# Altium PCB 795532117DJFLY-DG.PcbDoc
Units mm, origin at the board's own origin, x right, y up, seen from the top; angles counter-clockwise.
Board outline 30 x 36.5 mm, 2 copper layers (Top Layer, Bottom Layer); 40 components, 46 nets, 168 pads, 243 vias.
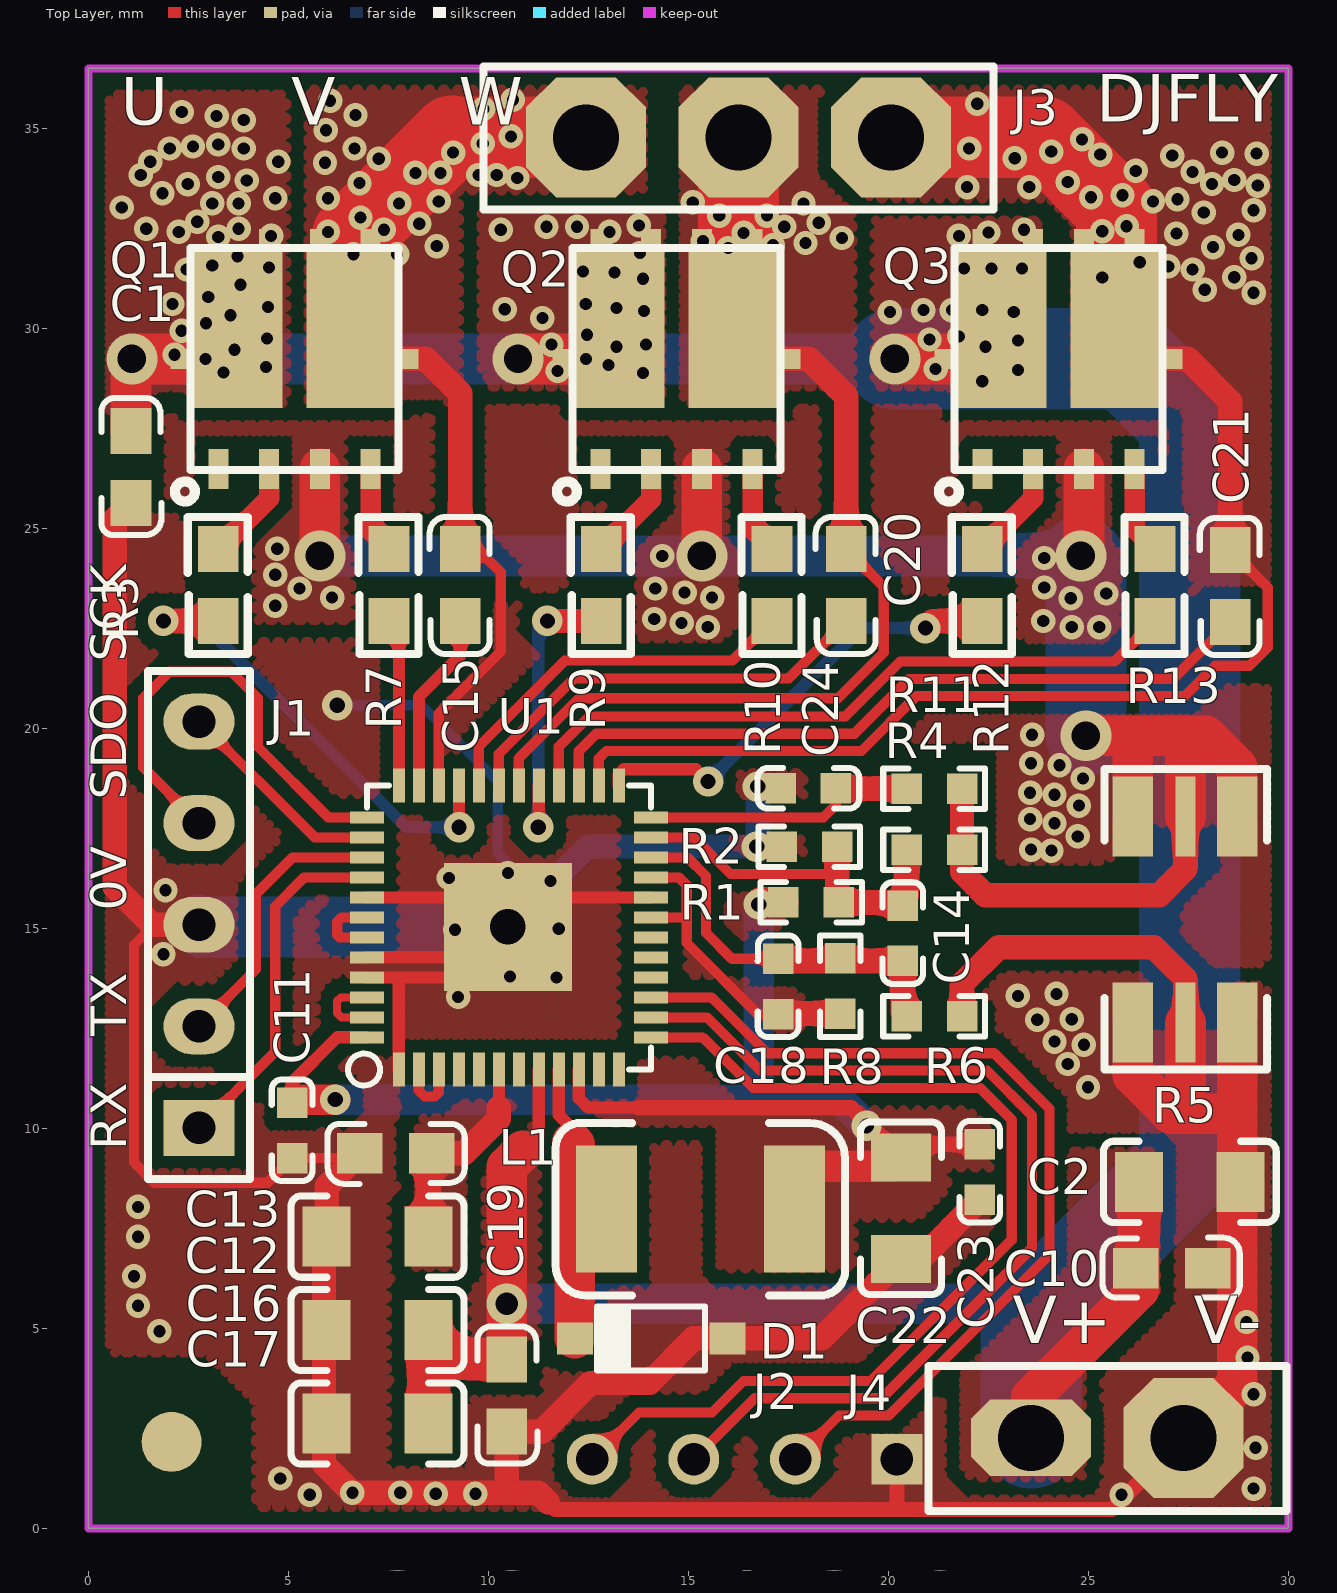
[diagram p0: Top Layer view]
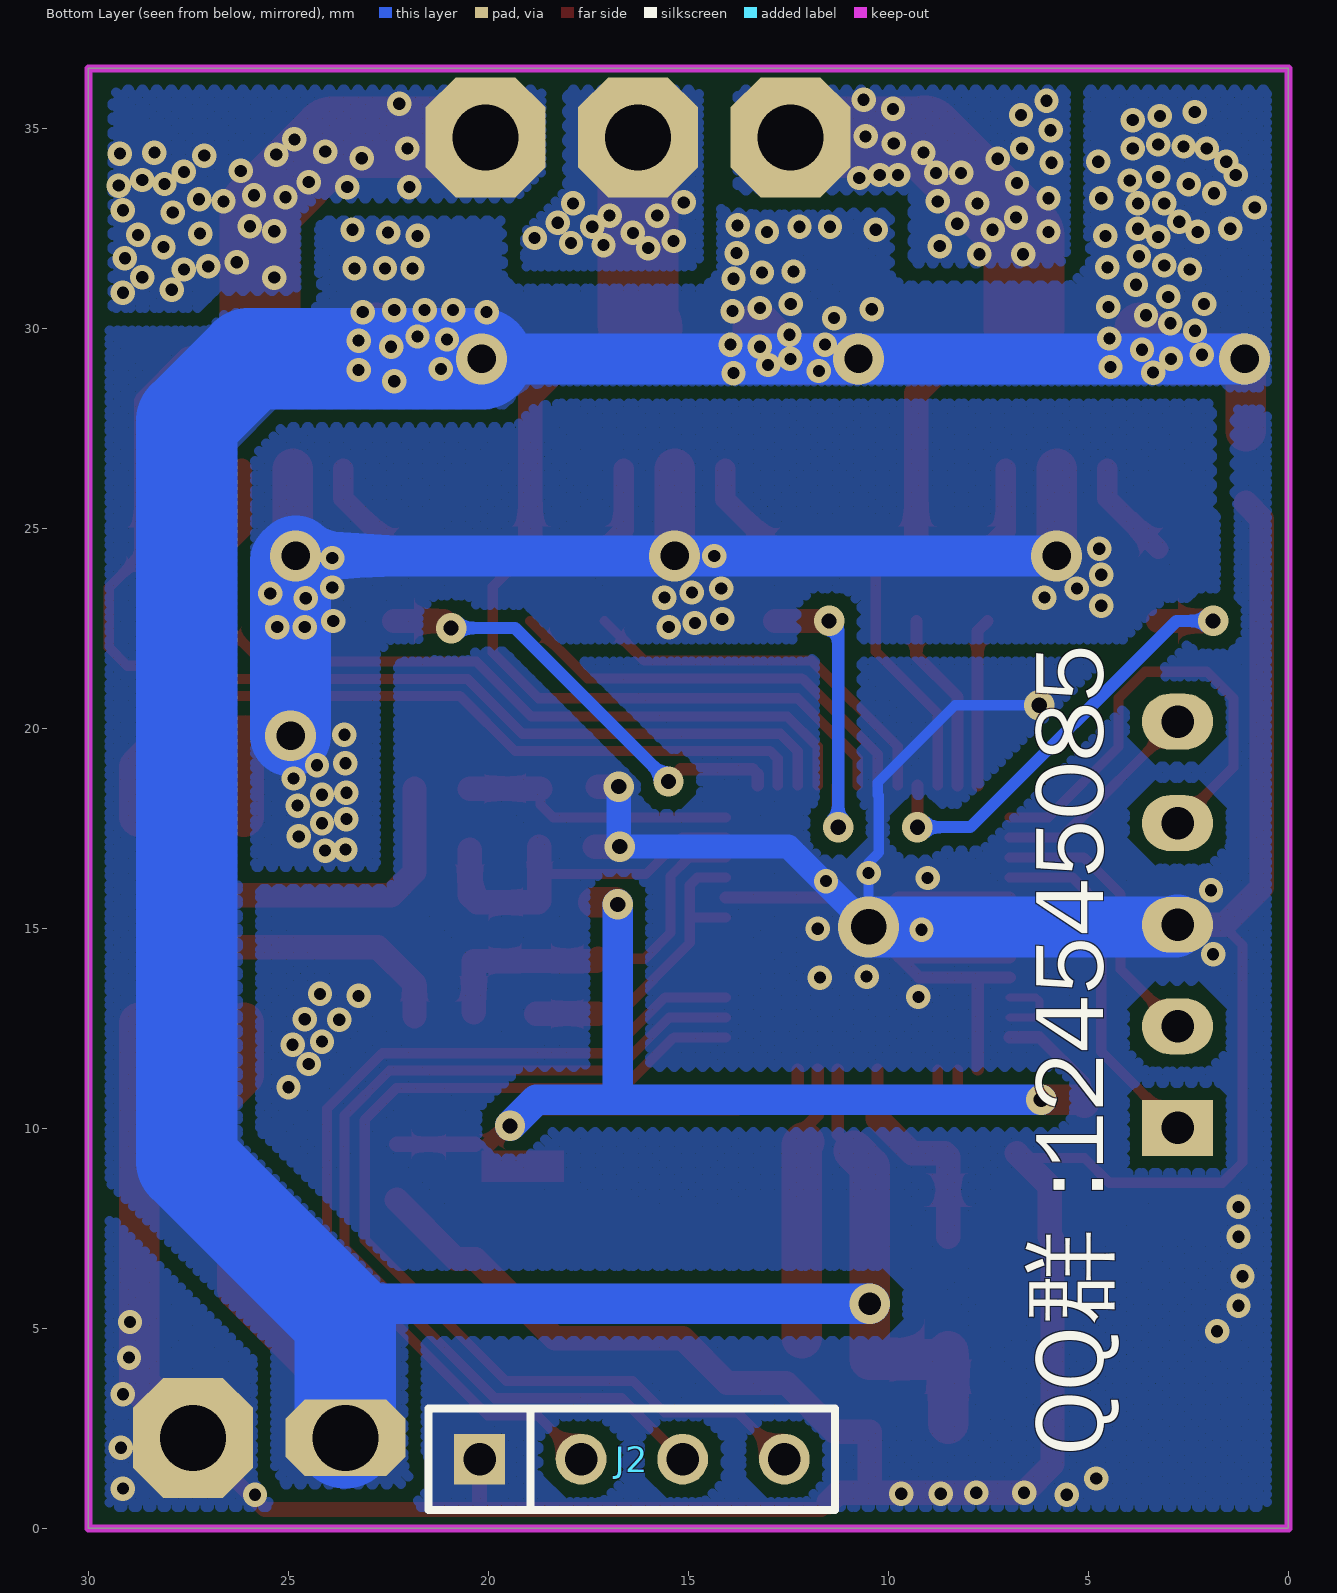
[diagram p1: Bottom Layer view, seen from below]

## Layer stack, top to bottom
Top Solder: solder mask 0.0102, Solder Resist, Dk 3.5
Top Layer: signal copper 0.0356
Dielectric 1: dielectric 0.32, FR-4, Dk 4.8
Bottom Layer: signal copper 0.0356
Bottom Solder: solder mask 0.0102, Solder Resist, Dk 3.5

## Board outline
0,0 30,0 30,36.5 0,36.5

## Design rules (kind name [scope] priority, off if disabled: settings)
Clearance [All] p1: gap=0.305
PolygonConnect [All] p1: connectstyle=Direct reliefconductorwidth=0.254 reliefentries=4 polygonreliefangle="90 Angle" airgapwidth=0.254
RoutingVias [All] p1: holewidth=0.711 width=1.27 viastyle="Through Hole" minholewidth=0.305 minwidth=0.61 maxholewidth=0.711 maxwidth=2.54
SolderMaskExpansion [All] p1: expansion=0.102
Width [All] p1: maxlimit=5.08 minlimit=0.152 preferedwidth=0.254
30 further rules are at their usual default settings.

## Components (designator, comment, footprint, x,y, rotation, side; value= is the part's Value field where it differs from the comment)
C1 "104/50V" 0805C 1.118,26.594 r270 top
C2 "106/50V" 1206C 27.559,8.636 r180 top
C10 "104/50V" 0805C 27.026,6.553 r0 top
C11 "104/10V" 0603C 5.029,9.982 r270 top
C12 "10uF/25V" 1206C 7.214,7.315 r0 top
C13 "104/50V" 0805C 7.747,9.322 r180 top
C14 "100pF/10V" 0603C 20.295,14.91 r270 top
C15 "104/50V" 0805C 9.246,23.52 r90 top
C16 "106/50V" 1206C 7.214,4.978 r0 top
C17 "106/50V" 1206C 7.214,2.642 r0 top
C18 "100pF/10V" 0603C 17.181,13.58 r270 top
C19 "104/50V" 0805C 10.516,3.378 r270 top
C20 "104/50V" 0805C 18.898,23.52 r90 top
C21 "104/50V" 0805C 28.499,23.495 r90 top
C22 "47uF/16V" 1206C 20.297,7.983 r90 top
C23 "104/10V" 0603C 22.225,8.941 r270 top
C24 "220pF/10V" 0603C 18.034,18.567 r180 top
D1 "BAT46W" SOD-123 14.072,4.75 r90 top
J1 "SWD" SIP5 2.769,10.008 r90 top
J2 "CONTROL" SIP4 20.218,1.727 r180 bottom
J3 "MOTOR" POW-3.81-3S 16.332,34.95 r0 top
J4 "POWER" POW-3.81-2S 25.502,2.032 r180 top
L1 "22uH" 1812C 17.526,7.976 r180 top
Q1 "SE3082G" DFN5*6 5.156,29.235 r0 top
Q2 "SE3082G" DFN5*6 14.707,29.235 r0 top
Q3 "SE3082G" DFN5*6 24.257,29.235 r0 top
R1 "27K" 0603 18.009,15.723 r180 top
R2 "1K" 0603 18.085,16.967 r0 top
R3 "51R" 0805 3.226,23.495 r90 top
R4 "1K" 0603 21.209,16.891 r0 top
R5 "0.01R/1%" 2512-K 27.407,15.316 r180 top
R6 "1K" 0603 21.209,12.725 r0 top
R7 "51R" 0805 7.493,23.495 r90 top
R8 "27K" 0603 18.872,13.614 r90 top
R9 "51R" 0805 12.802,23.495 r90 top
R10 "51R" 0805 17.069,23.495 r90 top
R11 "4.7K" 0603 21.209,18.415 r0 top
R12 "51R" 0805 22.327,23.495 r90 top
R13 "51R" 0805 26.645,23.495 r90 top
U1 "STSPIN32F0" VFQFPN48 14.072,11.481 r90 top (schematic designator U2)

## Footprints (in the part's own frame and the unit in brackets; to place one, negate y for a bottom-side part, rotate by r counter-clockwise, add the part's x,y. Pads: shape width x height; smd on the part's side, far side on the other; paste and mask are expansions set on the pad)
0603 [mil]
  rect 30x30 smd: 1(-29.48,2.91) 2(25.02,2.85)
  silkscreen extent -52,-17 48,23
0603C [mil]
  rect 30x30 smd: 1(-25.86,2.64) 2(28.64,2.57)
  silkscreen extent -49,-17 51,23
0805 [mil]
  rect 45x40 smd: 1(-31.97,-0.94) 2(38.9,-0.94)
  silkscreen extent -65,-30 70,29
0805C [mil]
  rect 45x40 smd: 1(-33.05,-1.99) 2(37.82,-1.99)
  silkscreen extent -66,-31 69,28
1206C [mm]
  rect 1.2x1.5 smd: 1(1.288,-0.023) 2(-1.252,-0.023)
  silkscreen extent -2.14,-1.04 2.18,0.99
1812C [mil]
  rect 60x125 smd: 1(-5,0) 2(180,0)
  silkscreen extent -55,-85 230,85
2512-K [mil]
  rect 40x78.74 smd: 1(-52,-97.32) 1(51,-97.32) 2(-52,105.31) 2(51,105.31)
  rect 20x78.74 smd: 1(-1,-97.32) 2(-1,105.31)
  silkscreen extent -81,-144 79,151
DFN5*6 [mm]
  rect 0.5x1 smd: 1(-1.905,-2.75) 2(-0.635,-2.75) 3(0.635,-2.75) 4(1.905,-2.75) 5(1.905,2.75) 6(0.635,2.75) 7(-0.635,2.75) 8(-1.905,2.75)
  rect 2.3x4 smd: 6(1.45,0.775) 8(-1.45,0.775)
  rect 1x0.5 smd: 6(2.6,0) 8(-2.6,0)
  silkscreen extent -2.99,-3.57 2.6,2.78
POW-3.81-2S [mil]
  oct 118.11x75 hole 65: 1(76,-9)
  oct 118.11x118.11 hole 65: 2(-74,-9)
  silkscreen extent -175,-80 177,63
POW-3.81-3S [mil]
  oct 118.11x118.11 hole 65: 1(147,-7) 2(-3,-7) 3(-153,-7)
  silkscreen extent -254,-78 248,63
SIP4 [mil]
  rect 50x50 hole 32: 1(0,0)
  round 50 hole 32: 2(100,0) 3(200,0) 4(300,0)
  silkscreen extent -50,-50 350,50
SIP5 [mil]
  rect 55x70 hole 32: 1(0,0)
  oval 55x70 hole 32: 2(100,0) 3(200,0) 4(300,0) 5(400,0)
  silkscreen extent -50,-50 450,50
SOD-123 [mm]
  rect 0.8x0.9 smd: A(0,-1.905) K(0,1.905)
  silkscreen extent -0.8,-1.35 0.8,1.35
VFQFPN48 [mm]
  rect 0.85x0.3 smd paste+0 mask+0.076: 1(-0.008,6.308) 2(-0.008,5.808) 3(-0.008,5.308) 4(-0.008,4.808) 5(-0.008,4.308) 6(-0.008,3.808) 7(-0.008,3.308) 8(-0.008,2.808) 9(-0.008,2.308) 10(-0.008,1.808) 11(-0.008,1.308) 12(-0.008,0.808) 25(7.092,0.808) 26(7.092,1.308) 27(7.092,1.808) 28(7.092,2.308) 29(7.092,2.808) 30(7.092,3.308) 31(7.092,3.808) 32(7.092,4.308) 33(7.092,4.808) 34(7.092,5.308) 35(7.092,5.808) 36(7.092,6.308)
  rect 0.3x0.85 smd paste+0 mask+0.076: 13(0.792,0.008) 14(1.292,0.008) 15(1.792,0.008) 16(2.292,0.008) 17(2.792,0.008) 18(3.292,0.008) 19(3.792,0.008) 20(4.292,0.008) 21(4.792,0.008) 22(5.292,0.008) 23(5.792,0.008) 24(6.292,0.008) 37(6.292,7.108) 38(5.792,7.108) 39(5.292,7.108) 40(4.792,7.108) 41(4.292,7.108) 42(3.792,7.108) 43(3.292,7.108) 44(2.792,7.108) 45(2.292,7.108) 46(1.792,7.108) 47(1.292,7.108) 48(0.792,7.108)
  rect 3.2x3.2 smd paste+0 mask+0.076: 49(3.556,3.581)
  silkscreen extent -0.41,0.01 7.09,7.57

## Part data
C1 C2 C10 C11 C12 C13 C14 C15 C16 C17 C18 C19 C20 C21 C22 C23 C24: library part C, "C"
D1: library part D, "D"
J1: library part CON5, "CN"
J2: library part CON4, "CN"
J3: library part CON3, "CN"
J4: library part CON2, "J"
L1: library part L, "10uH"
R1 R2 R3 R4 R5 R6 R7 R8 R9 R10 R11 R12 R13: library part R, "10K"

## Free pads (board coordinates)
  round 1.5 smd mask+1: 5(2.083,2.159)

## Via types
v1: diameter 0.61, hole 0.305, Top Layer to Bottom Layer, 222 vias
v2: diameter 0.762, hole 0.381, Top Layer to Bottom Layer, 12 vias
v3: diameter 1.27, hole 0.711, Top Layer to Bottom Layer, 7 vias
v4: diameter 1.016, hole 0.559, Top Layer to Bottom Layer, 1 vias
v5: diameter 1.524, hole 0.889, Top Layer to Bottom Layer, 1 vias

## Nets (pads, with @x,y where several pads share a name; then routed paths per layer and width w, separated by ;. In a path a pad name is that pad's centre, name@x,y a point inside that pad or via, vN(x,y) a via of type N, cw(c..) or ccw(c..) an arc to the next point about the centre after c; other vN are vias at no path point)
GND: C1.2 C2.2 C10.2 C11.2 C12.2 C13.2 C16.2 C17.2 C19.2 C22.2 C23.2 C24.2 D1.A J1.3 J2.1 J4.2 R2.1 R5.2 R6.2 U1.1 U1.20 U1.41 U1.44 U1.45 U1.49 | length 142
  Top Layer w0.254: J1.3 2.489,15.088 2.464,15.113 1.676,15.113 1.651,15.088 1.143,14.58 1.143,9.144 1.651,8.636 4.476,8.636 C11.2 C13.2@6.669,9.255
  Top Layer w0.305: U1.45 7.772,13.773 ; U1.44 U1.49@9.726,14.273 ; U1.41 9.754,15.773 v5(10.49,15.037) ; U1.1 7.763,13.764 7.772,13.773 ; U1.20 11.226,15.773 v5(10.49,15.037) ; 7.772,13.773 9.226,13.773 U1.49@9.726,14.273 ; U1.49@9.726,14.273 v5(10.49,15.037)
  Top Layer w0.381: 11.493,0.647 11.671,0.468 20.117,0.468 ; J2.1 20.218,0.57 20.117,0.468 ; J4.2 25.589,0.468 20.117,0.468
  Top Layer w0.61: C1.2 0.66,25.227 0.66,16.027 1.6,15.088 1.651,15.088 J1.3@2.489,15.088 ; C13.2 6.669,9.255 5.962,8.548 C12.2 5.893,7.223 5.893,1.6 v1(6.604,0.889) 10.363,0.889 ; 11.493,0.647 11.251,0.889 10.363,0.889 ; v2(16.713,17.043) 16.715,17.041 R2.1 ; v2(16.739,18.542) C24.2@17.267,18.542 ; R6.2 21.845,13.615 22.758,14.529 26.645,14.529 27.432,13.741 R5.2@27.432,12.641 ; C23.2 20.808,6.731 C22.2 18.339,4.75 D1.A 15.138,4.75 14.021,3.632 12.548,3.632 11.333,2.418 C19.2 10.465,0.991 10.363,0.889
  Top Layer w1.016: R5.2@26.111,12.641 26.111,11.328 27.076,10.363 ; J4.2 28.727,3.607 28.727,10.363 ; R5.2@27.432,12.641 27.432,10.719 27.076,10.363 ; R5.2@28.727,12.641 28.727,10.363 ; 27.076,10.363 28.727,10.363
  Bottom Layer w0.254: v2(6.223,20.574) 8.331,20.574 10.262,18.644 10.262,18.339 10.236,18.313 10.236,16.891 10.49,16.637 v5(10.49,15.037)
  Bottom Layer w0.61: v5(10.49,15.037) 12.497,17.043 v2(16.713,17.043) 16.739,17.069 v2(16.739,18.542)
  Bottom Layer w1.524: J1.3 2.819,15.037 v5(10.49,15.037)
  other v1: 5.537,0.838 25.832,0.838 8.687,0.864 9.677,0.864 7.798,0.889 29.134,0.991 4.801,1.245 29.185,2.011 29.134,3.353 28.981,4.267 1.778,4.928 28.956,5.156 1.245,5.563 1.143,6.299 1.245,7.29 1.245,8.035 24.994,11.024 24.486,11.608 24.892,12.087 24.155,12.167 23.724,12.715 24.587,12.725 9.246,13.284 23.241,13.31 24.206,13.36 11.709,13.767 10.541,13.792 1.88,14.351 9.169,14.961 11.76,14.986 1.93,15.951 11.557,16.18 9.017,16.256 10.49,16.383
HSU: R3.1 U1.33 | length 11.9
  Top Layer w0.3: U1.33 9.263,17.534 v2(9.271,17.526)
  Top Layer w0.61: v2(1.88,22.682) R3.1
  Bottom Layer w0.3: v2(1.88,22.682) 2.794,22.682 7.95,17.526 v2(9.271,17.526)
HSV: R9.1 U1.29 | length 7.6
  Top Layer w0.305: v2(11.252,17.526) 11.263,17.537 U1.29
  Top Layer w0.61: v2(11.481,22.682) R9.1
  Bottom Layer w0.305: v2(11.252,17.526) 11.252,22.454 v2(11.481,22.682)
HSW: R12.1 U1.25 | length 11.2
  Top Layer w0.305: U1.25 13.263,18.851 13.387,18.975 15.188,18.975 v2(15.494,18.669)
  Top Layer w0.61: v2(20.93,22.504) 21.108,22.683 R12.1
  Bottom Layer w0.305: v2(15.494,18.669) 19.329,22.504 v2(20.93,22.504)
LSU: R7.1 U1.36 | length 4.2
  Top Layer w0.3: R7.1 7.763,22.437 U1.36
LSV: R10.1 U1.32 | length 9.6
  Top Layer w0.254: U1.32 9.763,19.542 11.913,21.692 16.101,21.692 R10.1
LSW: R13.1 U1.28 | length 17.2
  Top Layer w0.254: U1.28 11.763,19.538 12.521,20.296 18.924,20.296 20.295,21.666 25.652,21.666 R13.1
NetC15_1: C15.1 U1.35 | length 4.5
  Top Layer w0.3: U1.35 8.263,20.785 9.296,21.818 C15.1
NetC20_1: C20.1 U1.31 | length 10.8
  Top Layer w0.254: U1.31 10.263,19.357 12.152,21.247 17.514,21.247 C20.1
NetC21_1: C21.1 U1.27 | length 18.5
  Top Layer w0.254: U1.27 12.263,19.427 12.7,19.864 19.153,19.864 20.523,21.234 27.128,21.234 C21.1
NetD1_K: D1.K L1.2 U1.9 | length 6.8
  Top Layer w0.305: U1.9 11.763,10.335 12.281,9.817
  Top Layer w1.016: 12.101,9.652 12.167,9.587 D1.K
NetQ1_2: Q1.2 R3.2 | length 2.5
  Top Layer w0.508: R3.2 4.521,25.754 Q1.2
NetQ1_4: Q1.4 R7.2 | length 2.2
  Top Layer w0.508: Q1.4 7.061,24.939 R7.2
NetQ2_2: Q2.2 R9.2 | length 2.5
  Top Layer w0.508: R9.2 14.072,25.729 Q2.2
NetQ2_4: Q2.4 R10.2 | length 2.2
  Top Layer w0.508: Q2.4 16.612,24.964 R10.2
NetQ3_2: Q3.2 R12.2 | length 2.5
  Top Layer w0.508: R12.2 23.622,25.754 Q3.2
NetQ3_4: Q3.4 R13.2 | length 2.2
  Top Layer w0.508: Q3.4 26.162,24.99 R13.2
OCCOMP: C24.1 R11.1 U1.24 | length 6.9
  Top Layer w0.254: U1.24 18.382,17.773 18.691,18.081 C24.1 C24.1@18.702,18.489
  Top Layer w0.61: C24.1@18.702,18.489 R11.1
OP1N: C14.2 C18.1 R6.1 R8.2 U1.22 | length 9.6
  Top Layer w0.254: U1.22 14.977,16.773 15.443,16.307 15.443,14.884 16.09,14.237 C18.1 ; R6.1@20.36,12.9 R6.1
  Top Layer w0.61: C18.1 17.303,14.182 C14.2 R6.1@20.36,12.9
OP1O: C18.2 R8.1 U1.19 U1.21 | length 7.9
  Top Layer w0.254: U1.19 14.928,15.273 14.961,15.24 ; U1.21 14.766,16.273 14.961,16.078 14.961,15.24 ; C18.2 16.738,12.853 14.961,14.63 14.961,15.24
  Top Layer w0.3: C18.2 C18.2@17.259,12.866
  Top Layer w0.61: C18.2@17.259,12.866 R8.1
OP1P: C14.1 R1.1 R2.2 R4.1 U1.23 | length 9.4
  Top Layer w0.254: U1.23 15.137,17.273 16.055,16.355 18.672,16.355 18.72,16.307
  Top Layer w0.61: R2.2 18.72,16.307 18.72,15.686 R1.1 20.28,15.649 20.46,15.829 R4.1
OP2N: U1.42 U1.43 | length 1.9
  Top Layer w0.254: U1.43 6.284,14.773 6.223,14.834 6.223,15.164 6.332,15.273 U1.42
OP3N: U1.46 U1.47 | length 1.9
  Top Layer w0.203: U1.47 6.328,12.773 6.223,12.878 6.223,13.183 6.313,13.273 U1.46
OP4N: U1.2 U1.3 | length 1.7
  Top Layer w0.254: U1.2 8.263,10.956 8.255,10.947 8.407,10.795 8.661,10.795 8.763,10.897 U1.3
OUTU: C15.2 J3.3 Q1.5 Q1.6 U1.34 | length 22.2
  Top Layer w0.254: U1.34 8.763,20.371 10.312,21.92 10.312,23.901 9.733,24.481 C15.2
  Top Layer w0.61: Q1.6@7.756,29.235 8.433,29.235 9.296,28.372 C15.2
  Top Layer w2.032: Q1.6@6.606,30.01 6.606,32.311 9.093,34.798 9.119,34.773 J3.3
  other v1: 6.629,31.852 7.722,31.852 8.712,32.055 5.994,32.41 7.391,32.461 8.277,32.614 6.807,32.766 7.772,33.122 8.763,33.172 5.994,33.249 6.782,33.63 10.726,33.757 9.754,33.833 10.211,33.833 8.179,33.884 8.803,33.884 5.918,34.138 7.264,34.239 9.12,34.392 6.655,34.493 9.862,34.62 10.566,34.798 5.94,34.95 6.68,35.331 9.881,35.484 6.045,35.687 10.617,35.712
OUTV: C20.2 J3.2 Q2.5 Q2.6 U1.30 | length 24.5
  Top Layer w0.254: U1.30 10.763,19.247 12.267,20.751 18.744,20.751 19.888,21.895 19.888,23.541 C20.2
  Top Layer w0.61: Q2.6@17.307,29.235 18.009,29.235 18.948,28.296 C20.2
  Top Layer w2.032: Q2.6@16.157,30.01 16.256,30.11 J3.2
  other v1: 16.002,32.004 17.12,32.08 17.932,32.131 15.367,32.182 18.841,32.258 16.383,32.385 17.399,32.537 18.263,32.639 15.773,32.817 16.967,32.817 17.882,33.122 15.113,33.147
OUTW: C21.2 J3.1 Q3.5 Q3.6 U1.26 | length 36.6
  Top Layer w0.254: U1.26 12.763,19.242 12.954,19.432 19.332,19.432 20.702,20.803 27.407,20.803 28.169,21.565 29.032,21.565 29.489,22.022 29.489,23.516 C21.2
  Top Layer w0.61: Q3.6@26.857,29.235 27.483,29.235 28.549,28.169 C21.2
  Top Layer w2.032: J3.1 23.901,34.773 25.707,32.967 Q3.6@25.707,30.01
  other v1: 29.134,30.886 27.915,30.963 25.349,31.267 28.651,31.277 27.61,31.471 27,31.547 26.289,31.648 29.083,31.75 28.118,32.029 28.753,32.334 27.203,32.366 25.349,32.424 25.959,32.551 27.889,32.893 29.134,32.95 26.619,33.172 27.229,33.223 25.07,33.274 25.857,33.325 21.971,33.528 23.527,33.528 29.235,33.567 28.092,33.607 24.486,33.655 28.651,33.706 27.61,33.909 26.187,33.934 23.165,34.249 27.102,34.315 25.298,34.341 29.21,34.366 28.346,34.392 24.075,34.417 22.022,34.493 24.847,34.722 22.225,35.611
PA0: U1.11
PA1: U1.12
PA2: J2.4 U1.13 | length 25.6
  Top Layer w0.254: J2.4 13.767,2.896 15.596,2.896 16.383,3.683 19.558,3.683 23.089,7.214 23.089,10.211 22.288,11.011 16.622,11.011 15.36,12.273 U1.13
PA3: J2.3 U1.14 | length 24.5
  Top Layer w0.254: U1.14 15.471,12.773 16.801,11.443 22.467,11.443 23.597,10.313 23.597,7.01 19.837,3.251 16.662,3.251 J2.3
PA4: J2.2 U1.15 | length 23.2
  Top Layer w0.254: U1.15 15.581,13.273 16.98,11.874 22.646,11.874 24.028,10.492 24.028,6.832 20.016,2.819 18.771,2.819 J2.2
PA5: U1.16
PA6: U1.17
PA7_CFG: U1.18
PA13: J1.4 U1.37 | length 11.8
  Top Layer w0.254: J1.4 1.372,19.025 1.372,20.752 2.032,21.412 3.581,21.412 4.242,20.752 4.242,19.533 6.002,17.773 U1.37
PA14: J1.5 U1.38 | length 5.4
  Top Layer w0.254: J1.5 5.663,17.273 U1.38
PB6: J1.1 U1.40 | length 8.9
  Top Layer w0.254: J1.1 4.674,11.913 4.674,15.545 5.402,16.273 U1.40
PB7: J1.2 U1.39 | length 7
  Top Layer w0.254: J1.2 4.191,13.97 4.191,15.85 5.114,16.773 U1.39
PF0: U1.4
PF1: U1.5
RST: U1.7
SENSEP: Q1.3 Q2.3 Q3.3 R4.2 R5.1 R11.2 | length 49.2
  Top Layer w0.61: R11.2 R4.2 21.845,16.408 22.428,15.824 26.772,15.824 27.432,16.485 R5.1@27.432,17.788
  Top Layer w1.016: v3(5.791,24.308) Q1.3 ; v3(15.342,24.308) Q2.3 ; v3(24.816,24.308) 24.892,24.384 Q3.3 ; v3(24.943,19.812) 26.06,19.812 ; R5.1@26.111,17.788 26.111,19.761 26.06,19.812 ; R5.1@27.432,17.788 27.432,19.304 27.94,19.812 ; R5.1@28.727,17.788 28.727,19.025 27.94,19.812 ; 26.06,19.812 27.94,19.812
  Bottom Layer w1.016: v3(5.791,24.308) v3(15.342,24.308) v3(24.816,24.308)
  Bottom Layer w2.032: v3(24.816,24.308) 24.943,24.181 v3(24.943,19.812)
  other v1: 24.079,16.942 23.571,16.967 24.74,17.297 24.155,17.628 23.546,17.729 24.765,18.067 24.155,18.339 23.546,18.39 24.867,18.745 24.282,19.075 23.571,19.126 23.597,19.837 15.487,22.53 24.587,22.53 25.277,22.53 14.834,22.631 23.876,22.682 14.148,22.733 4.674,23.063 24.562,23.251 6.096,23.266 15.597,23.266 25.451,23.368 14.91,23.393 5.283,23.495 14.173,23.495 23.901,23.52 4.674,23.838 23.901,24.257 14.351,24.308 4.724,24.486
VDD: C11.1 C22.1 C23.1 L1.1 R1.2 U1.10 U1.48 | length 33.9
  Top Layer w0.305: C11.1 5.096,11.141 6.228,12.273 U1.48 ; U1.10 12.263,10.749 12.497,10.516 13.767,10.516
  Top Layer w0.381: 13.767,10.516 19.075,10.516 C22.1@19.993,9.598 ; C22.1@20.32,9.598 C23.1
  Top Layer w0.762: C11.1 5.176,10.719 v2(6.172,10.719) ; v2(16.764,15.596) 16.819,15.65 R1.2
  Bottom Layer w0.762: v2(6.172,10.719) 16.84,10.719 ; v2(16.764,15.596) 16.764,10.795 16.84,10.719 ; v2(19.456,10.058) 18.796,10.719 16.84,10.719
VM: C1.1 C2.1 C10.1 C16.1 C17.1 C19.1 J4.1 Q1.7 Q1.8 Q2.7 Q2.8 Q3.7 Q3.8 U1.8 | length 96.9
  Top Layer w0.305: 10.864,9.442 11.263,9.841 U1.8
  Top Layer w1.016: C1.1 1.067,29.21 v3(1.092,29.235) ; C17.1 8.502,4.42 8.704,4.218 C19.1 10.465,9.039 10.866,9.44 ; J4.1 23.571,3.277 26.271,5.976 C2.1
  Top Layer w1.27: v3(1.092,29.235) 2.556,29.235 v1(2.931,29.235) Q1.8@3.706,30.01 ; v3(10.744,29.235) 12.107,29.235 12.482,29.235 Q2.8@13.257,30.01 ; v3(20.168,29.235) 21.657,29.235 22.032,29.235 Q3.8@22.807,30.01
  Bottom Layer w1.016: v4(10.465,5.613) 23.165,5.613 23.571,5.207
  Bottom Layer w1.27: v3(1.092,29.235) v3(10.744,29.235) v3(20.168,29.235)
  Bottom Layer w2.54: v3(20.168,29.235) 25.984,29.235 27.534,27.686 27.534,9.169 23.571,5.207 J4.1
  other v1: 22.352,28.677 3.378,28.891 13.868,28.88 11.735,28.931 23.241,28.956 21.184,28.981 4.445,29.032 13.005,29.083 12.446,29.235 2.159,29.337 3.658,29.464 13.208,29.54 22.428,29.54 11.582,29.591 13.945,29.591 23.241,29.693 21.031,29.718 4.472,29.743 21.768,29.794 12.471,29.84 2.332,29.937 2.946,30.124 11.354,30.255 3.556,30.328 20.041,30.404 23.139,30.404 13.894,30.429 20.879,30.455 21.59,30.455 22.352,30.455 10.414,30.476 13.208,30.505 4.496,30.531 2.103,30.607 12.439,30.607 2.999,30.785 3.81,31.09 13.868,31.237 13.157,31.394 12.37,31.42 2.464,31.471 21.895,31.496 22.581,31.496 23.343,31.496 4.521,31.521 3.099,31.572 3.734,31.801 13.792,31.879 3.251,32.283 4.572,32.309 21.765,32.309 22.504,32.395 2.261,32.41 13.03,32.41 10.312,32.461 23.393,32.461 1.448,32.487 3.759,32.487 11.455,32.537 12.217,32.537 13.767,32.572 2.723,32.664 0.838,33.02 3.099,33.122 3.759,33.122 4.674,33.249 1.854,33.376 2.489,33.604 3.962,33.695 3.251,33.782 1.31,33.833 1.549,34.163 4.75,34.163 2.038,34.493 3.886,34.493 2.616,34.544 3.251,34.595 3.89,35.204 3.21,35.306 2.337,35.408
VREG12: C12.1 C13.1 U1.6 | length 5.4
  Top Layer w0.3: 10.263,10.516 U1.6
  Top Layer w0.61: C12.1 8.502,9.288 C13.1 9.398,9.372 10.263,10.238 10.263,10.516
pads on no net: Q1.1 Q2.1 Q3.1

## Polygon pours and split planes (outlines as drawn)
VM on Top Layer "Top Layer-No Net" (hatched 45Degree grid 0.254 track 0.254, remove dead copper, pour order 24): 23.901,28.219 23.52,27.838 0.432,27.838 0.432,36.068 0.381,36.119 0.66,35.839 23.73,35.839 23.73,27.985 23.774,27.94
OUTW on Top Layer "Top Layer-No Net" (hatched 45Degree grid 0.254 track 0.254, remove dead copper, pour order 22): 18.999,36.093 29.667,36.093 29.794,35.966 29.642,35.814 29.642,21.793 27.483,21.793 27.305,21.971 27.178,22.098 27.178,28.092 24.79,28.092 24.663,28.219 24.663,32.614 24.054,33.223 24.028,33.249 19.533,33.249 19.533,35.636 19.025,36.144
OUTV on Top Layer "Top Layer-No Net" (hatched 45Degree grid 0.254 track 0.254, remove dead copper, pour order 20): 15.011,28.143 15.138,28.016 19.101,28.016 19.101,36.271 19.152,36.322 19.101,36.373 14.884,36.373 14.884,28.194 14.935,28.143 14.986,28.092 15.291,28.092
SENSEP on Top Layer "Top Layer-No Net" (hatched 45Degree grid 0.254 track 0.254, remove dead copper, pour order 19): 29.718,14.148 29.693,14.122 28.219,14.122 28.067,14.122 27.407,14.783 27.407,15.367 27.407,15.443 28.118,16.154 28.423,16.459 28.423,17.628 25.73,17.628 25.629,17.729 25.552,17.653 25.552,16.688 22.809,16.688 22.784,16.713 22.809,16.739 22.809,19.329 22.809,19.406 22.708,19.507 22.479,19.736 19.609,19.736 17.501,19.736 15.596,21.641 15.443,21.793 2.591,21.793 2.591,24.816 1.727,25.679 1.626,25.781 1.626,27.965 8.788,27.965 9.322,28.499 9.83,27.991 26.899,27.991 26.899,22.606 27.838,21.666 27.864,21.692 29.769,21.692 29.769,14.148 29.718,14.097
VDD on Top Layer "Top Layer-No Net" (hatched 45Degree grid 0.254 track 0.254, remove dead copper, pour order 0): 15.443,16.307 15.494,16.256 17.297,16.256 17.297,14.554 17.196,14.453 17.043,14.605 15.824,14.605 15.723,14.605 15.443,14.884 15.443,16.307
OP1O on Top Layer "Top Layer-No Net" (hatched 45Degree grid 0.254 track 0.254, remove dead copper, pour order 2): 14.961,14.63 15.697,14.63 15.767,14.561 16.09,14.237 17.562,14.237 17.931,13.868 17.805,13.743 17.805,12.344 16.789,12.344 16.739,12.395 15.723,13.411 14.986,13.411 14.986,14.605 14.961,14.63
VDD on Top Layer "Top Layer-No Net" (hatched 45Degree grid 0.254 track 0.254, remove dead copper, pour order 4): 12.395,11.76 12.421,11.735 15.773,11.735 16.231,11.735 16.789,11.176 16.954,11.011 22.288,11.011 23.089,10.211 22.885,10.008 22.885,8.992 22.581,8.992 21.488,7.899 20.091,6.502 18.771,6.502 15.926,6.502 15.9,6.477 15.799,6.579 15.799,10.135 12.878,10.135 12.497,10.516 12.268,10.744 12.268,11.735
VREG12 on Top Layer "Top Layer-No Net" (hatched 45Degree grid 0.254 track 0.254, remove dead copper, pour order 6): 8.153,11.176 10.719,11.176 10.744,11.151 10.592,10.998 10.592,10.211 10.236,10.211 9.398,9.372 9.373,9.347 9.373,6.528 8.103,6.528 8.077,6.553 8.263,6.739 8.263,11.473
VM on Top Layer "Top Layer-No Net" (hatched 45Degree grid 0.254 track 0.254, remove dead copper, pour order 8): 10.592,10.616 11.404,10.616 11.455,10.668 11.379,10.592 11.379,4.801 9.803,4.801 9.748,4.746 9.601,4.893 9.601,9.296 9.601,9.551 10.592,10.542
VM on Top Layer "Top Layer-No Net" (hatched 45Degree grid 0.254 track 0.254, remove dead copper, pour order 10): 24.257,9.474 24.308,9.423 26.695,9.423 26.695,5.867 25.019,4.191 24.841,4.013 24.841,1.27 22.098,1.27 21.971,1.397 21.895,1.473 21.895,4.14 21.895,4.369 24.028,6.502 24.511,6.985 24.511,9.398
GND on Top Layer "Top Layer-No Net" (hatched 45Degree grid 0.254 track 0.254, remove dead copper, pour order 14): 22.428,13.36 22.885,13.818 22.962,13.818 26.238,13.818 26.391,13.665 26.416,13.64 26.416,12.344 28.524,12.344 28.55,12.319 28.651,12.421 28.651,13.564 29.515,13.564 29.642,13.437 29.845,13.233 29.845,0.152 4.318,0.152 4.115,0.356 4.191,0.432 4.191,2.896 4.191,3.15 3.048,4.293 2.946,4.394 0.381,4.394 0.381,25.121 0.279,25.222 0.33,25.273 3.048,25.273 3.048,22.454 2.362,21.768 2.743,22.149 18.009,22.149 18.009,19.583 17.831,19.406 18.085,19.152 21.717,19.152 21.717,17.458 20.806,16.547 20.345,16.086 20.345,11.862 22.634,11.862 22.646,11.874 22.784,12.012 22.784,12.929 22.784,13.106 22.581,13.31
OUTU on Top Layer "Top Layer-No Net" (hatched 45Degree grid 0.254 track 0.254, remove dead copper, pour order 16): 10.262,23.089 10.287,23.063 10.947,23.063 10.947,22.885 11.659,22.174 11.684,22.149 11.684,21.539 11.684,21.463 9.763,19.542 9.627,19.406 8.738,19.406 8.738,20.498 9.144,20.904
OUTU on Top Layer "Top Layer-No Net" (hatched 45Degree grid 0.254 track 0.254, remove dead copper, pour order 18): 9.347,27.762 9.195,27.915 5.512,27.915 5.512,36.144 5.486,36.17 5.512,36.195 13.868,36.195 13.868,33.503 13.741,33.376 13.665,33.452 9.271,33.452 9.271,27.838 9.296,27.813
GND on Bottom Layer "Top Layer-No Net" (hatched 45Degree grid 0.254 track 0.254, remove dead copper, pour order 36): 0.532,28.524 0.71,28.346 1.727,28.346 1.727,23.47 1.6,23.343 2.489,22.454 22.911,22.454 22.911,16.746 22.809,16.644 23.158,16.296 26.391,16.296 26.391,10.135 26.01,9.754 26.094,9.838 29.468,9.838 29.468,0.224 29.566,0.127 29.413,0.279 0.152,0.279 0.152,28.145 0.532,28.524
VM on Bottom Layer "Top Layer-No Net" (hatched 45Degree grid 0.254 track 0.254, remove dead copper, pour order 34): 25.07,1.092 22.2,1.092 21.92,1.372 22.123,1.575 22.123,5.817 22.428,5.817 24.359,7.747 26.264,9.652 26.264,27.229 2.769,27.229 1.549,28.448 1.473,28.524 0.356,28.524 0.356,36.043 0.508,36.195 0.635,36.068 29.515,36.068 29.515,8.687 29.489,8.661 25.324,4.496 25.324,4.343 25.324,1.295 25.121,1.092
OUTW on Bottom Layer "Top Layer-No Net" (hatched 45Degree grid 0.254 track 0.254, remove dead copper, pour order 32): 18.593,36.246 28.956,36.246 29.388,35.814 29.388,30.505 24.968,30.505 24.638,30.836 24.79,30.988 24.79,32.842 24.765,32.842 24.181,33.426 24.003,33.249 19.456,33.249 19.329,33.249 18.618,33.96 18.669,34.011 18.669,36.297
OUTV on Bottom Layer "Top Layer-No Net" (hatched 45Degree grid 0.254 track 0.254, remove dead copper, pour order 30): 14.681,36.17 18.11,36.17 18.161,36.119 18.034,35.992 18.034,33.655 18.034,33.452 19.101,32.385 19.075,32.36 19.075,31.547 14.91,31.547 14.834,31.623 14.732,31.725 14.732,36.119
OUTU on Bottom Layer "Top Layer-No Net" (hatched 45Degree grid 0.254 track 0.254, remove dead copper, pour order 28): 5.436,36.119 13.792,36.119 13.919,35.992 13.767,35.839 13.767,33.452 9.576,33.452 9.474,33.553 9.398,33.477 9.398,31.623 5.74,31.623 5.512,31.852 5.563,31.902 5.563,36.093
SENSEP on Bottom Layer "Top Layer-No Net" (hatched 45Degree grid 0.254 track 0.254, remove dead copper, pour order 26): 26.162,16.535 22.809,16.535 22.809,21.844 22.606,22.047 22.428,22.225 1.803,22.225 1.803,25.298 1.956,25.451 1.905,25.502 1.905,28.118 25.502,28.118 26.187,27.432 26.162,27.407 26.162,16.535

## Keep-outs
Keep-Out Layer:
  the board outline again, w0.2

## Other copper
Top Layer:
  rectangle net VDD: 18.11,8.661 20.168,9.449

## Silkscreen, mask and mechanical layers (free items; w line width, h text height)
Top Overlay:
  text "DJFLY" at 25.197,34.773 h2.03
  text "U      V      W" at 0.813,34.696 h2.03
  text "RX   TX    0V   SDO  SCK" at 1.245,9.449 h1.52 r90
  text "V+    V-" at 23.114,4.242 h2.03
  text "36.5*30mm" at 6.553,-5.004 h5
Bottom Overlay:
  text "QQ群 :124545085" at 4.039,1.829 h3.05 r270
Top Solder:
  rectangle: 7.823,12.319 13.132,16.764
  lines w0.1: 11.709,33.02 11.709,33.172
Bottom Solder:
  rectangle: 7.95,12.243 13.284,16.815